# EAGLE board rj_11_v3_MH48 (EAGLE 7.6.0)
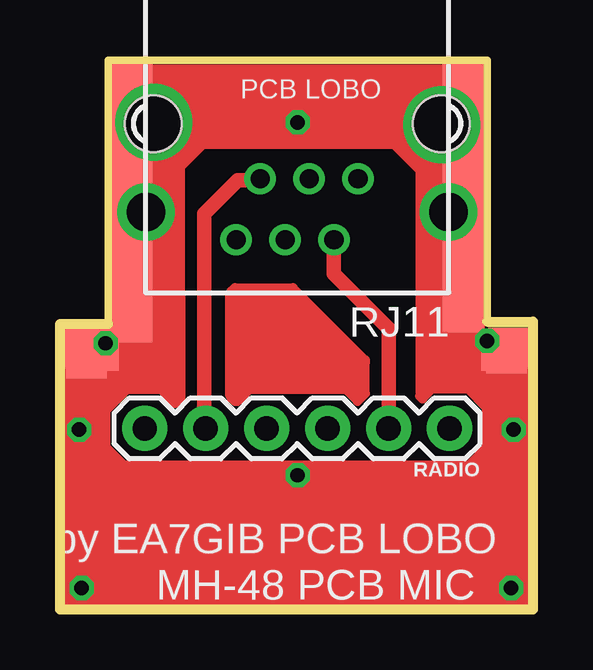
[diagram p0: board, top side]
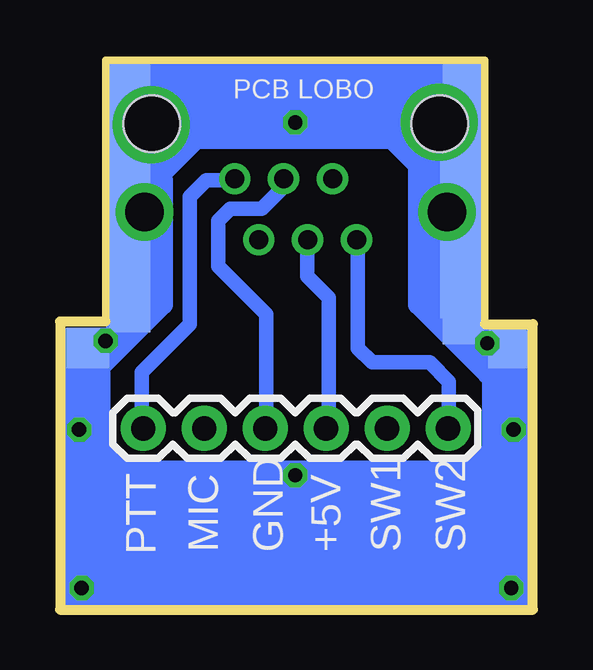
[diagram p1: board, bottom side, seen from below]

Size 19.7 x 22.9 mm. Coordinates in mm from the lower left corner, seen from the top.
Outline: 2,11.9 2,22.9 17.8,22.9 17.8,12 19.7,12 19.7,0 0,0 0,11.9 2,11.9
Copper layers (1*16): Top 0.035mm / dielectric 1.5mm / Bottom 0.035mm
Design rules "default": minimum track width 10mil, minimum drill 24mil, track to track 8mil, track to pad 8mil, pad to pad 8mil, via to via 8mil, smd to smd 8mil, copper to edge 40mil, drill to drill 8mil, minimum pad ring 10mil, minimum via ring 8mil, stop-mask expansion 4mil, vias tented up to drill 0mil, thermal gap 10mil

## Footprints (pad centres in the part's own frame; a part is rotated, then mirrored left to right if it is on the bottom)
TP17SQ = smd 1.7 x 1.7: TP 0,0
1X06 = drill 1.016 pad 1.88: 1 0,0; 2 2.54,0; 3 5.08,0; 4 7.62,0; 5 10.16,0; 6 12.7,0
YH-55-10 = drill 0.8 pad 1.3: 1 -2.54,2.3; 2 -1.54,4.84; 3 -0.5,2.3; 4 0.5,4.84; 5 1.54,2.3; 6 2.54,4.84 | drill 1.6 pad 2.184: S1 -6.3,3.68; S2 6.3,3.68 | hole 2.36: -6,0; 6,0

## Placement (x,y rotation side)
E$2  [TP17SQ]  1.1,10.5 0 top
E$3  [TP17SQ]  1,10.9 0 top
E$4  [TP17SQ]  3,21.9 0 top
E$5  [TP17SQ]  3,20.7 0 top
E$6  [TP17SQ]  3,19.6 0 top
E$7  [TP17SQ]  3,18.6 0 top
E$8  [TP17SQ]  3,17.6 0 top
E$9  [TP17SQ]  3,16.6 0 top
E$10  [TP17SQ]  3,15.6 0 top
E$11  [TP17SQ]  3,14.4 0 top
E$12  [TP17SQ]  3,13.6 0 top
E$13  [TP17SQ]  3,12.9 0 top
E$14  [TP17SQ]  3,12 0 top
E$15  [TP17SQ]  16.8,21.9 0 top
E$16  [TP17SQ]  16.8,20.7 0 top
E$17  [TP17SQ]  16.8,19.3 0 top
E$18  [TP17SQ]  16.8,18.1 0 top
E$19  [TP17SQ]  16.8,16.9 0 top
E$20  [TP17SQ]  16.8,16 0 top
E$21  [TP17SQ]  16.8,15.1 0 top
E$22  [TP17SQ]  16.8,14.1 0 top
E$23  [TP17SQ]  16.8,13.5 0 top
E$24  [TP17SQ]  16.8,12.7 0 top
E$25  [TP17SQ]  16.8,12.4 0 top
E$26  [TP17SQ]  18.7,10.9 0 top
E$27  [TP17SQ]  18.4,10.8 0 top
E$28  [TP17SQ]  18.6,10.7 0 top
E$29  [TP17SQ]  1,10.9 0 top
E$30  [TP17SQ]  1.4,10.9 0 top
E$31  [TP17SQ]  1.6,10.8 0 top
E$32  [TP17SQ]  1.6,10.9 0 top
E$33  [TP17SQ]  2.9,21.9 0 bottom
E$34  [TP17SQ]  3,20.7 0 bottom
E$35  [TP17SQ]  3,19.1 0 bottom
E$36  [TP17SQ]  3,18 0 bottom
E$37  [TP17SQ]  3,16.8 0 bottom
E$38  [TP17SQ]  3,15.4 0 bottom
E$39  [TP17SQ]  3,14.3 0 bottom
E$40  [TP17SQ]  3,13 0 bottom
E$41  [TP17SQ]  2.9,11.9 0 bottom
E$42  [TP17SQ]  1,10.9 0 bottom
E$43  [TP17SQ]  1.5,10.9 0 top
E$44  [TP17SQ]  16.8,21.9 0 bottom
E$45  [TP17SQ]  16.8,20.9 0 bottom
E$46  [TP17SQ]  16.8,20 0 bottom
E$47  [TP17SQ]  16.8,19 0 bottom
E$48  [TP17SQ]  16.8,17.9 0 bottom
E$49  [TP17SQ]  16.8,17.2 0 bottom
E$50  [TP17SQ]  16.8,16.1 0 bottom
E$51  [TP17SQ]  16.8,14.9 0 bottom
E$52  [TP17SQ]  16.8,14 0 bottom
E$53  [TP17SQ]  16.8,12.4 0 bottom
E$54  [TP17SQ]  18.5,10.9 0 bottom
E$55  [TP17SQ]  18.6,10.9 0 bottom
RADIO  [1X06]  16.23,7.55 180 top
RJ11  [YH-55-10]  9.88,20.25 180 top

## Library data of the parts
E$2-E$55 = testpad
RADIO = SparkFun-Connectors
RJ11 = con-wenzhou-yihua

## Tracks (layer width: path | path; a pad name or v marks a point on that pad's centre or on a via)
S$1
  Bottom 0.61: 12.5,17.9 13.6,17.9 14.3,17.2 14.3,11.9 16.3,9.9 16.3,7.9
S$2
  Top 0.61: 13.7,7.6 13.7,10.6
S$3
  Bottom 0.61: 10.5,17.5 11.3,16.7 12.6,16.7 13.1,16.2 13.1,14.3 11.1,12.3 11.1,7.5
S$4
  Bottom 0.61: 8.5,7.7 8.5,13 9.4,13.9 9.4,15.2 9.5,15.3
S$5
  Top 0.61: 6,7.7 6,16.5 7.4,17.9 8.3,17.9
S$6
  Bottom 0.61: 7.3,15.5 7.3,10.9 6.7,10.3 4.3,10.3 3.5,9.5 3.5,7.7 3.4,7.6
S$7  (via drill 2.2)
  other vias: 15.9,20.2
S$8  (via drill 2.2)
  other vias: 3.9,20.3
S$9
  Bottom 0.406: 3.2,13 3.5,13.1 3.5,20.1
  Bottom 0.61: 16.1,16.3 16.1,20 15.7,20.4 3.8,20.4 3.5,20.1 3.5,16.6
S$10
  Bottom 0.406: 17.3,12.9 15.3,13 15.3,20.2
S$11  (via drill 0.6)
  other vias: 9.9,20.3 1.9,11.1 17.8,11.2 9.9,5.6 0.9,0.9 18.8,0.9 0.8,7.5 18.9,7.5
S$12
  Bottom 0.813: 1.5,9.8 1.5,6.9 2.8,5.6
S$13
  Bottom 0.813: 18.2,7.7 18.2,6.9 17.2,5.9
S$14
  Top 0.813: 1.6,10.1 1.6,6.8 2.7,5.7
S$15
  Top 0.61: 13.7,7.5 13.7,11.7 11.4,14 11.4,15.2
S$16
  Top 0.813: 3.4,15 3.4,14.7 4.8,13.3 4.8,12.7 1.9,9.8 1.9,10.4 4.2,12.7 3.1,12.7 2,11.6
S$17
  Bottom 0.813: 3.1,12.4 4.1,13.4 4.1,13 1.9,10.8 1.9,11.4 3.3,12.8 4.6,12.8 4.8,13 4.8,12.7 1.9,9.8
S$18
  Top 0.813: 17.3,12.6 17.3,10.9 18.2,10 18.1,10 15.4,12.7 16.3,12.7 16.9,12.1 16.9,12.6 16.7,12.8
  Bottom 0.813: 16.5,15.3 16.5,14.3 15.4,13.2 15.4,12.8 17.8,10.4 17.8,11.1 16.2,12.7 16.9,12.1 17.8,11.2 17.6,11.2 17.1,12.3
S$19
  Top 0.406: 15,18.6 15,8.9 15.1,8.8 16.1,9.8 | 16.1,9.8 17.1,10.8 | 16.1,9.8 16.4,9.8 18.3,7.9 18.3,8.3 17.6,9 17.6,9.9 17.5,10 | 17.5,10 15.6,11.9 15.6,11.5 | 15.6,10.2 15.6,9.8 17.3,9.8 | 17.5,9.8 17.3,9.8 | 17.3,9.8 15.6,11.5 | 15.6,11.5 15.6,10.2 | 15.6,10.2 15.9,9.9 17.4,9.9 17.5,10 | 17.5,10 16,10 15.8,10.2 16.3,10.2 16.4,10.3 16,10.3 15.9,10.4 16.3,10.4 16.4,10.5 15.9,10.5 15.8,10.6 16,10.6 | 16.2,10.6 16,10.6 | 16,10.6 15.8,10.8 16,10.8 16.1,10.9 15.9,10.9 15.8,11
  Top 0.813: 12.3,20.4 13.2,20.4 15,18.6 16.1,17.5 | 18.3,8.9 18.3,7.9 18.3,7 17.2,5.9
S$20
  Top 0.813: 7.7,20.3 6.6,20.3 4.6,18.3
S$21
  Bottom 0.813: 6.5,20.5 6.5,20.2 4.8,18.5 4.8,18.8 6.7,20.7 12.9,20.7 16,17.6 15.7,17.6 15.4,17.9 15.4,12.7 18.1,10
S$22
  Bottom 0.813: 3.2,15.9 3.2,13.4
S$23
  Top 0.813: 3,13.1 2.9,13.1 2.5,12.7
S$24
  Top 0.406: 3.5,13.1 5,13.1 5,8.8 4.8,8.6 3.7,9.7 | 3.7,9.7 2.7,10.7 2.7,9.1 | 2.7,9.1 1.7,8.1 1.7,8.4 2.4,9.1 2.7,9.1 | 2.7,9.1 2.8,9.2 4.5,9.2 4.6,9.1 | 4.6,9.1 4.7,9 4.7,12.1 4.8,12.2 4.8,12 1.9,9.1 2,9.1 2.3,9.4 4.2,9.4 4.3,9.5 4.3,11 | 4.3,11 4.6,11.3 | 4.3,11 3,9.7 3.7,9.7 | 3.7,9.7 3.7,10.1 | 3.7,10.1 4.1,10.5 | 3.7,10.1 3.4,9.8 3.8,9.8 4,10 4,10.2 4.1,10.3 4.1,9.8 4,9.7 | 4.6,9.1 4.6,12.2
S$25
  Top 0.406: 18.7,9.2 17.7,9.2 | 17.7,9.2 15.3,9.2 15.2,9.1 15.2,12.2 15.3,12.3 15.3,9.7 15.5,9.5 17.4,9.5 17.7,9.2
S$26
  Top 0.406: 7.8,9.6 11.5,9.6 12.4,8.7 12.7,9 12.7,10.3 10.1,12.9 10.1,11.2 10.3,11 11.6,11 12.4,10.2 12.4,9.2 12.3,9.1 12.3,9.4 12.1,9.6 12.1,10.1 11.9,10.3 11.9,9.6 12.1,9.4 12.1,10.6 10.4,12.3 10.4,11.4 10.8,11.4 | 11.2,11.4 10.8,11.4 | 10.8,11.4 10.6,11.6 10.9,11.6 11,11.5
S$27
  Top 0.406: 11.6,9.6 8.3,9.6 7.4,8.7 7.3,8.7 7.1,8.9 7.1,13.2 7.3,13.4 9.7,13.4 12.7,10.4 12.5,10.4 9.8,13.1 7.5,13.1 7.4,13.2 7.4,9
(copper drawn outside any net)
  shapes: Bottom area x12, Top area x11

## Text on the board
tPlace: PCB LOBO | by EA7GIB PCB LOBO | MH-48 PCB MIC
bPlace: PCB LOBO | SW2 | SW1 | +5V | GND | MIC | PTT